# Altium PCB PD_SMARTKEY_EMN-EVAN_V2.0.PcbDoc (part 2 of 2)
Units mil, origin at the board's own origin, x right, y up, seen from the top; angles counter-clockwise.
Board outline 1720.47 x 2326.77 mil, 2 copper layers (Top Layer, Bottom Layer); 109 components, 70 nets, 316 pads, 405 vias.
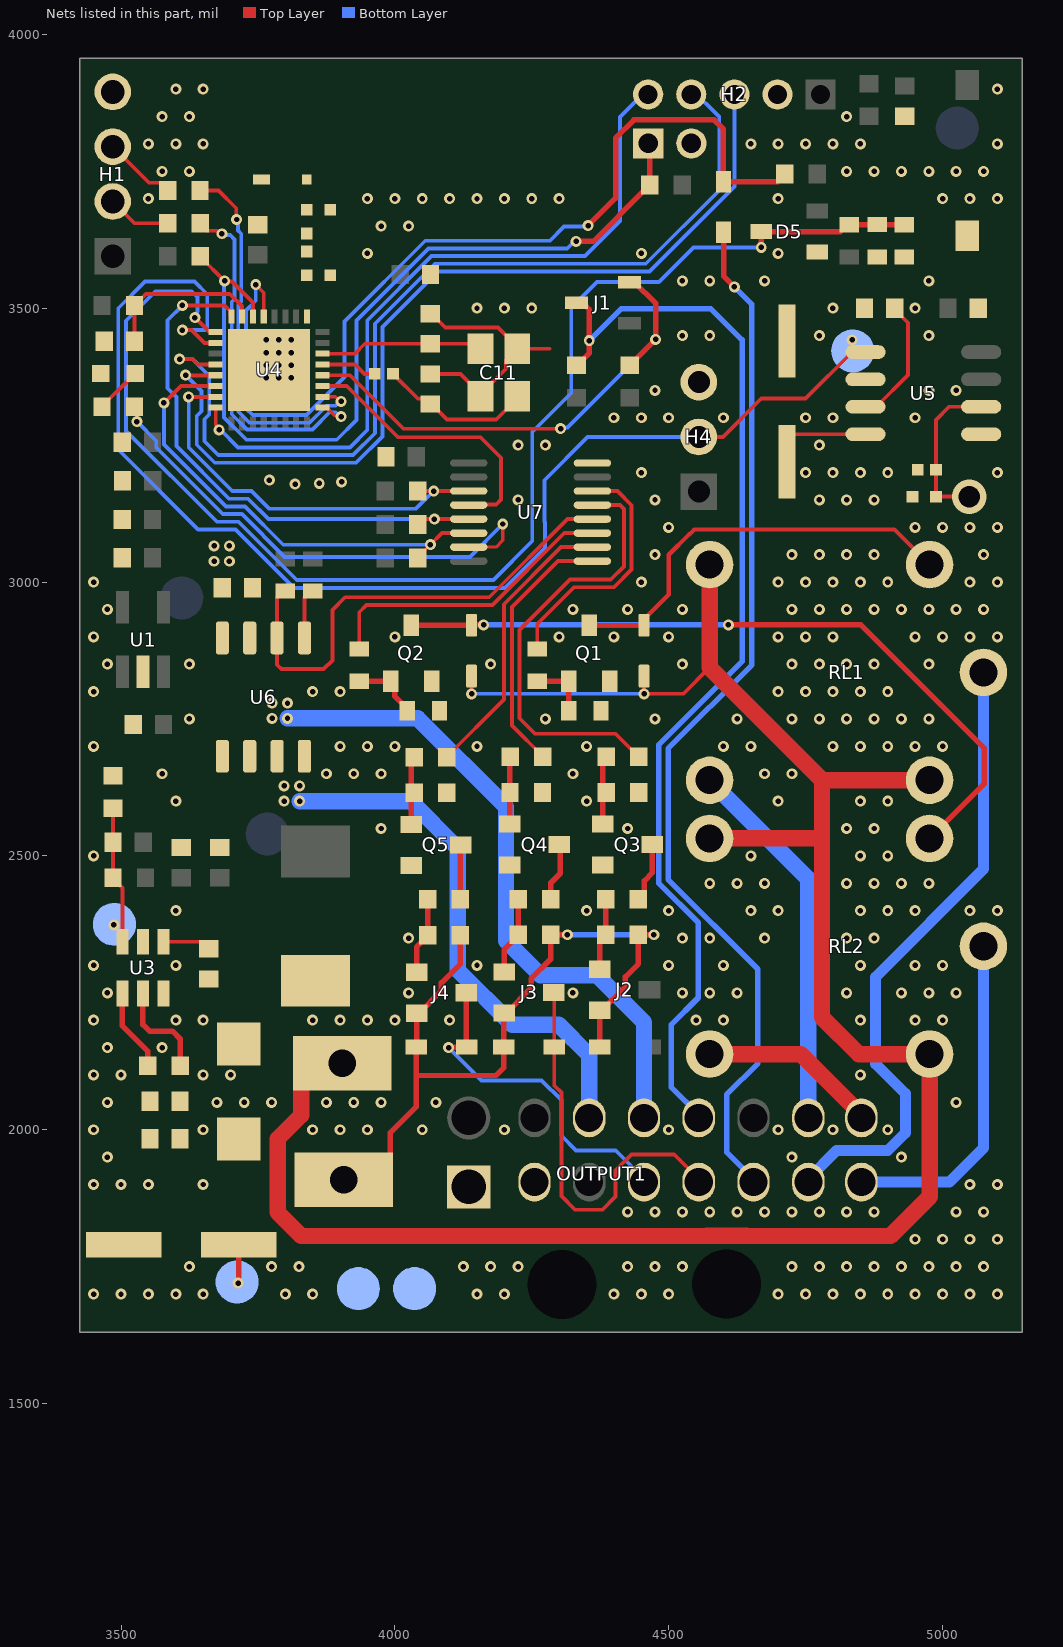
[diagram p2: the nets of this part, all layers, seen from the top]

## Via types
v1: diameter 20, hole 10, Top Layer to Bottom Layer, tented both sides, 404 vias
v2: diameter 62.99, hole 39.37, Top Layer to Bottom Layer, tented both sides, 1 vias

## Nets (pads, with @x,y where several pads share a name; then routed paths per layer and width w, separated by ;. In a path a pad name is that pad's centre, name@x,y a point inside that pad or via, vN(x,y) a via of type N, cw(c..) or ccw(c..) an arc to the next point about the centre after c; other vN are vias at no path point) (continued)
CAR_IGN: D9.2 J4.3 OUTPUT1.4 | length 633.2
  Top Layer w10: v1(4098,2150) 4098.75,2150.75 D9.2@4131.16,2150.75 4130.27,2151.64 J4.3@4130.27,2250
  Bottom Layer w7: v1(4098,2150) 4158,2090 4268,2090 4304,2054 4304,1989 4331,1962 4403.28,1962 4454.9,1910.38 OUTPUT1.4@4454.9,1904.48
CAR_LOCK: OUTPUT1.10 RL1.2 | length 691.3
  Bottom Layer w30: RL1.2@4574.72,2638.15 4754.9,2457.97 OUTPUT1.10@4754.9,2021.48
CAR_MINIO_BREAK: D7.1 OUTPUT1.6 | length 1934
  Top Layer w10: D7.1@4600,3638.84 4600.5,3638.34 4600.5,3558.5 v1(4620,3539)
  Bottom Layer w10: v1(4620,3539) 4652,3507 4652,2848.96 4499,2695.96 4499,2457.04 4663,2293.04 4663,2121 4606,2064 4606,1959.28 4657,1908.28 4657,1905 4654.9,1905 OUTPUT1.6@4654.9,1904.48
CAR_START: D8.2 J3.3 OUTPUT1.5 | length 733
  Top Layer w7: J3.3@4290.27,2250.75 4291.16,2249.86 D8.2@4291.16,2150.75 4291.16,2080.84 4304,2068 4304,1879 4329,1854 4379,1854 4403,1878 4403,1926 4432,1955 4510.28,1955 4554.9,1910.38 OUTPUT1.5@4554.9,1904.48
CAR_TRUNK_B+: OUTPUT1.14 U6.7 U6.8 | length 966.3
  Bottom Layer w30: v1(3826,2600) 4029,2600 4114.84,2514.16 4114.84,2291.16 4214,2192 4299,2192 4354.9,2136.1 OUTPUT1.14@4354.9,2021.48
  other v1: 3798,2600 3798,2628 3826,2628
CAR_TRUNK_B-: OUTPUT1.13 U6.5 U6.6 | length 1198.9
  Bottom Layer w30: v1(3804,2751) 4042,2751 4203,2590 4203,2345 4266,2282 4369,2282 4454.9,2196.1 OUTPUT1.13@4454.9,2021.48
  other v1: 3776,2751 3776,2779 3804,2779
CAR_UNLOCK: OUTPUT1.9 RL2.2 | length 329
  Top Layer w30: RL2.2@4574.72,2138.15 4741.13,2138.15 4851.9,2027.38 OUTPUT1.9@4851.9,2021.48
CLK: H2.4 U4.12 | length 1733.8
  Top Layer w7: v1(3607,3407) 3630.47,3407 3640.17,3397.3 U4.12@3672.93,3397.3
  Bottom Layer w7: v1(3607,3407) 3630.24,3407 3661,3376.24 3661,3306 3652.3,3297.3 3652.3,3257.1 3677.61,3231.79 3923.59,3231.79 3963.57,3271.77 3963.57,3285.77 3963.57,3471.74 4073.01,3581.18 4458.23,3581.18 4592.47,3715.42 4592.47,3849.3 H2.4@4541.26,3900.5
CS2: H2.5 U4.16 | length 1339.6
  Top Layer w7: U4.16@3672.93,3318.56 3672.93,3316.62 3673,3316.55 3673,3287.52 3679,3281.52 v1(3679,3278)
  Bottom Layer w7: v1(3679,3278) 3681.6,3278 3713.81,3245.79 3917.79,3245.79 3949.57,3277.57 3949.57,3477.54 4067.21,3595.18 4347.18,3595.18 4410.98,3658.98 4410.98,3848.96 H2.5@4462.52,3900.5
D_N: R4.1 U4.25 | length 665.4
  Top Layer w7: R4.1@3644.66,3655 3644.66,3653.87 3657.04,3641.49 3674.99,3641.49 3680.48,3636 v1(3684,3636) ; U4.25@3868.01,3318.56 3875.3,3318.56 3889.37,3304.49 3899.51,3304.49 v1(3902,3302)
  Bottom Layer w7: v1(3684,3636) 3686.49,3633.51 3699.55,3633.51 3707.5,3625.56 3707.5,3517.07 3702.19,3511.76 3702.19,3306.34 3729.73,3278.81 3849.38,3278.81 3880.57,3310 3891.4,3310 3899.4,3302 v1(3902,3302)
D_P: R5.1 U4.26 | length 706.7
  Top Layer w7: R5.1@3644.32,3715 3678,3715 3710.5,3682.5 3710.5,3662.5 v1(3711,3662) ; U4.26@3868.01,3338.25 3891.31,3338.25 3899.55,3330 v1(3902,3330)
  Bottom Layer w7: v1(3711,3662) 3713.49,3659.51 3713.49,3641.99 3719.5,3635.98 3719.5,3512.1 3714.19,3506.79 3714.19,3311.31 3734.7,3290.81 3844.4,3290.81 3875.6,3322 3891.4,3322 3899.4,3330 v1(3902,3330)
DATA_SYN480R: H4.2 TP8.1 U4.10 U5.5 | length 2376.8
  Top Layer w7: v1(3612,3460) 3629,3460 3652.33,3436.67 U4.10@3672.93,3436.67 ; H4.2@4555,3265 4599,3265 4669,3335 4750.08,3335 4835.08,3420 U5.5@4843.22,3420 ; v1(4835,3442) 4835,3428.22 U5.5@4843.22,3420 ; U5.5@4859.39,3420 U5.5@4843.22,3420
  Bottom Layer w7: v1(3612,3460) 3612.5,3460.5 3653.39,3460.5 3657.5,3464.6 3657.5,3525.5 3634,3549 3544,3549 3495,3500 3495,3241.8 3640.9,3095.9 3641,3096 3709,3096 3816,2989 4201,2989 4274,3062 4274,3109 4273,3110 4273,3186 4352,3265 H4.2@4555,3265
EN: C18.1 R6.2 U4.7 | length 298.7
  Top Layer w7: C18.1@3524.66,3440 3524.66,3506.13 3537.04,3518.51 3538.17,3518.51 3545.66,3526 3698.59,3526 3720.85,3503.75 3720.85,3485.41 U4.7@3721.26,3485
GND: C2.2 C3.2 C4.2 C6.2 C7.2 C8.2 C9.2 C10.2 C11.2 C11.4 C12.2 C13.2 C14.2 C15.2 C16.2 C17.2 C18.2 C19.2 C20.2 C21.1 C22.2 C23.1 C24.1 C25.2 C26.2 C27.2 C28.2 D4.1 D5.1 H1.4 H2.2 H3.2 H4.3 L3.1 OUTPUT1.2 Q1.2 Q2.2 Q3.2 Q4.2 Q5.2 R3.1 R13.1 R17.1 R22.1 R23.2 R29.2 R35.2 RF1.2 S1.2 TP5.1 TP6.1 U1.2 U3.2 U4.33 U5.1 U5.6 U6.3 U7.8 | length 468
  Top Layer w7: C19.2@4065,3380.12 4119.6,3380.12 C11.4@4156.53,3343.19 ; C20.2@4065,3490.12 4066.97,3490.12 4092.09,3465 4188.27,3465 4223.47,3429.8 C11.2@4223.47,3425.87 ; C11.4@4156.53,3339.25 C11.4@4156.53,3343.19 ; 4282.87,3425.87 C11.2@4223.47,3425.87 ; C11.4@4156.53,3343.19 4202.84,3389.5 4202.84,3405.24 C11.2@4223.47,3425.87
  other v1: 3450,1700 3500,1700 3550,1700 3600,1700 3650,1700 3800,1700 3850,1700 4150,1700 4200,1700 4400,1700 4450,1700 4500,1700 4700,1700 4750,1700 4800,1700 4850,1700 4900,1700 4950,1700 5000,1700 5050,1700 5100,1700 3625,1750 3775,1750 3825,1750 4125,1750 4175,1750 4225,1750 4425,1750 4475,1750 4525,1750 4725,1750 4775,1750 4825,1750 4875,1750 4925,1750 4975,1750 5025,1750 5075,1750 4950,1800 5000,1800 5050,1800 5100,1800 4425,1850 4475,1850 4525,1850 4575,1850 4625,1850 4675,1850 4725,1850 4775,1850 4825,1850 4875,1850 5025,1850 5075,1850 3450,1900 3500,1900 3550,1900 3650,1900 5050,1900 5100,1900 3475,1950 4725,1950 4925,1950 3450,2000 3650,2000 3850,2000 3900,2000 3950,2000 4050,2000 4200,2000 4500,2000 4700,2000 4800,2000 4900,2000 3475,2050 3675,2050 3725,2050 3775,2050 3875,2050 3925,2050 3975,2050 4075,2050 5025,2050 3450,2100 3500,2100 3650,2100 3700,2100 4850,2100 3475,2150 3575,2150 3450,2200 3600,2200 3650,2200 3850,2200 3900,2200 3950,2200 4000,2200 4100,2200 4550,2200 4600,2200 4850,2200 4950,2200 5000,2200 3475,2250 4025,2250 4325,2250 4525,2250 4575,2250 4625,2250 4825,2250 4925,2250 4975,2250 5025,2250 3450,2300 3600,2300 4150,2300 4500,2300 4600,2300 4850,2300 4950,2300 5000,2300 4025,2350 4525,2350 4575,2350 4675,2350 4825,2350 4875,2350 3600,2400 4350,2400 4500,2400 4650,2400 4700,2400 4850,2400 4900,2400 4950,2400 5050,2400 5100,2400 4575,2450 4625,2450 4675,2450 4825,2450 4875,2450 4925,2450 4975,2450 3450,2500 4650,2500 4850,2500 4900,2500 3975,2550 4425,2550 4825,2550 4875,2550 3600,2600 4350,2600 4700,2600 4850,2600 4900,2600 3575,2650 3875,2650 3925,2650 3975,2650 4325,2650 4675,2650 4725,2650 3450,2700 3900,2700 3950,2700 4000,2700 4150,2700 4350,2700 4600,2700 4650,2700 4800,2700 4850,2700 4900,2700 4950,2700 5000,2700 3625,2750 4275,2750 4475,2750 4625,2750 4725,2750 4775,2750 4825,2750 4875,2750 4925,2750 4975,2750 3450,2800 3850,2800 3900,2800 4700,2800 4750,2800 4800,2800 4850,2800 4900,2800 3475,2850 3625,2850 4175,2850 4525,2850 4725,2850 4775,2850 4825,2850 4875,2850 4975,2850 3450,2900 4000,2900 4300,2900 4400,2900 4500,2900 4700,2900 4750,2900 4800,2900 4950,2900 5000,2900 5050,2900 5100,2900 3475,2950 4325,2950 4425,2950 4525,2950 4725,2950 4775,2950 4825,2950 4875,2950 4925,2950 4975,2950 5025,2950 5075,2950 3450,3000 4450,3000 4700,3000 4750,3000 4800,3000 4850,3000 4900,3000 5050,3000 5100,3000 4475,3050 4725,3050 4775,3050 4825,3050 4875,3050 5075,3050 4500,3100 4950,3100 5000,3100 5050,3100 5100,3100 4225,3150 4475,3150 4775,3150 4825,3150 4875,3150 3818,3179 3862,3180 3903,3183 3771,3186 4450,3200 4750,3200 4800,3200 4850,3200 4900,3200 5100,3200 4225,3250 4275,3250 4775,3250 4400,3300 4450,3300 4500,3300 4600,3300 4750,3300 4800,3300 4950,3300 4475,3350 4975,3350 5025,3350 3765,3373 3788,3373 3811,3373 3765,3396 3788,3396 3811,3396 3765,3419 3788,3419 3811,3419 3765,3442 3788,3442 3811,3442 4525,3450 4575,3450 4775,3450 4975,3450 4150,3500 4200,3500 4250,3500 4800,3500 4950,3500 4525,3550 4575,3550 4675,3550 4975,3550 3950,3600 4450,3600 4700,3600 3975,3650 4025,3650 3550,3700 3950,3700 4000,3700 4050,3700 4100,3700 4150,3700 4200,3700 4250,3700 4300,3700 4700,3700 5000,3700 5050,3700 5100,3700 3575,3750 3625,3750 4825,3750 4875,3750 4925,3750 4975,3750 5025,3750 5075,3750 3550,3800 3600,3800 3650,3800 4650,3800 4700,3800 4750,3800 4800,3800 4850,3800 5100,3800 3575,3850 3625,3850 4825,3850 3600,3900 3650,3900 5100,3900
HC595-CLK: R9.1 U4.15 U7.11 | length 742.3
  Top Layer w7: v1(3623.61,3338.13) 3623.67,3338.19 U4.15@3672.93,3338.25 U4.15@3672.93,3338.25 ; R9.1@4041.51,3166.18 v1(4071,3166.18) U7.11@4135,3166.18
  Bottom Layer w7: v1(3623.61,3338.13) 3623.61,3245.59 3703.2,3166 3737.99,3166 3769.99,3134 4038.82,3134 v1(4071,3166.18)
HC595-DATA: R8.1 U4.14 U7.14 | length 858.1
  Top Layer w7: v1(3578.37,3326.97) 3609.33,3357.93 U4.14@3672.93,3357.93 ; R8.1@4041.66,3044 4041.66,3045.13 v1(4064.76,3068.24) 4085.94,3089.41 U7.14@4135,3089.41
  Bottom Layer w7: v1(3578.37,3326.97) 3578.37,3251.24 3691.6,3138 3726.4,3138 3796.16,3068.24 v1(4064.76,3068.24)
HC595-ENABLE: R7.1 U4.8 U7.13 | length 1000.5
  Top Layer w7: v1(3612,3505) 3689.24,3505 3699.56,3494.68 3699.56,3487.01 U4.8@3701.57,3485 ; R7.1@4041.66,3105 4051.66,3115 v1(4072,3115) U7.13@4135,3115
  Bottom Layer w7: v1(3612,3505) 3585,3478 3585,3354 3601.12,3337.88 3601.12,3248.28 3697.4,3152 3732.2,3152 3769.2,3115 v1(4072,3115)
HC595-LATCH: U4.27 U7.12 | length 519.7
  Top Layer w7: U4.27@3868.01,3357.93 3912.07,3357.93 4005.61,3264.39 4156.61,3264.39 4194,3227 4194,3150.75 4185.09,3141.83 4136.24,3141.83 U7.12@4135,3140.59
HV-MD125KHZ: J1.3 OUTPUT1.12 R14.2 | length 2024
  Top Layer w10: J1.3@4331.38,3510 4338.19,3503.19 4349.14,3503.19 4355,3497.33 v1@4355,3438.29 ; R14.2@4331.75,3396.08 4332.88,3396.08 4355,3418.2 v1(4355,3441)
  Bottom Layer w10: v1(4355,3441) 4413,3499 4577,3499 4634,3442 4634,2855 4482,2703 4482,2450 4554,2378 4554,2241 4505,2192 4505,2077.28 4554.9,2027.38 OUTPUT1.12@4554.9,2021.48
LED_STATUS: R19.1 U7.15 | length 928.2
  Top Layer w6: R19.1@3524.66,3320 3529,3315.66 v1(3529,3293) ; U7.15@4135,3063.82 4184.82,3063.82 4197,3076 v1(4197,3106)
  Bottom Layer w7: v1(3529,3293) 3564.37,3257.63 3564.37,3245.44 3685.8,3124 3720.6,3124 3798.6,3046 4137,3046 v1(4197,3106)
LV-MD125KHZ: J1.2 R15.2 U4.28 | length 913.2
  Top Layer w7: U4.28@3868.01,3377.62 3918.38,3377.62 4016,3280 4301,3280 4302,3281 4302.68,3280.32 v1(4302.68,3280.08)
  Top Layer w10: J1.2@4428.62,3547.4 4437.87,3547.4 4476,3509.28 v1@4476,3443.06 ; R15.2@4429.02,3396.08 4430.15,3396.08 4441.02,3406.95 4441.02,3408.09 v1@4475.94,3443
  Bottom Layer w7: v1(4302.68,3280.08) 4304.98,3282.38 4315.38,3282.38 v1(4476,3443)
MCU_ACC: R24.1 U7.5 | length 812.6
  Top Layer w7: U7.5@4360.65,3140.59 4411.41,3140.59 4418.34,3133.66 4418.34,3028.64 4394.3,3004.6 4319.99,3004.6 4227.66,2912.27 4227.66,2751.34 4256,2723 4402.75,2723 4430.99,2694.76 4432.12,2694.76 4445,2681.88 R24.1@4445,2680.75
MCU_ECVAN_BREAK: C24.2 D5.3 R20.1 R22.2 U4.9 | length 2473.9
  Top Layer w7: v1(3635,3483) 3659.63,3458.37 3670.92,3458.37 U4.9@3672.93,3456.36
  Top Layer w10: v1(4669,3611) 4668.82,3611.18 D5.3@4668.82,3640 4813.66,3640 4826.06,3652.4 R20.1@4830,3652.4 R22.2@4930,3652.4
  Bottom Layer w7: v1(3635,3483) 3637.49,3485.49 3637.49,3491.7 3639.39,3493.6 3639.39,3520.61 3629,3531 3563,3531 3509,3477 3509,3276 3675,3110 3714.8,3110 3820.8,3004 4180,3004 4251,3075 4251,3274 4322,3345 4322,3501 4369,3548 4482,3548 4545,3611 v1(4669,3611)
MCU_EVAN-EMN: H3.1 R10.1 R25.2 U4.6 | length 1574.9
  Top Layer w7: R10.1@3644.66,3595 3644.66,3593.87 v1@3688.76,3549.76 ; v1@3689.53,3549 3689.68,3548.85 3702.84,3548.85 3740.94,3510.74 U4.6@3740.94,3485
  Top Layer w10: v1(4331,3622) 4362.34,3622 4453.33,3712.99 4454.46,3712.99 4465.34,3723.87 R25.2@4465.34,3725 ; R25.2@4465.63,3730.29 H3.1@4465.63,3805
  Bottom Layer w7: v1(3689,3550) 3688.19,3549.19 3688.19,3300.54 3728.94,3259.79 3893.88,3259.79 3930,3295.91 3930,3477.77 4061.41,3609.18 4314.83,3609.18 4327.65,3622 v1(4331,3622)
MCU_IGN: R36.1 U7.2 | length 527.5
  Top Layer w7: R36.1@4094.66,2680 4094.66,2681.13 4199,2785.47 4199,2959.4 4303.42,3063.82 U7.2@4360.65,3063.82
MCU_LOCK: R11.2 U7.6 | length 458.8
  Top Layer w7: R11.2@4260,2877.87 4260,2923.36 4327.23,2990.6 4400.1,2990.6 4432.34,3022.84 4432.34,3140.19 4406.34,3166.18 U7.6@4360.65,3166.18
MCU_MINIO_BREAK: D7.2 R26.2 U4.5 | length 1742.3
  Top Layer w7: v1(3746,3543) 3760.63,3528.37 U4.5@3760.63,3485
  Top Layer w10: v1(4353,3651) 4403,3701 4403,3810.63 4436.37,3844 4583,3844 4600,3827 D7.2@4600,3731.16 4699.16,3731.16 4711.86,3743.87 R26.2@4711.86,3745
  Bottom Layer w7: v1(3746,3543) 3746,3513.75 3728.19,3495.94 3728.19,3348.3 3728.19,3317.11 3740.5,3304.81 3838.61,3304.81 3869.8,3336 3908,3374.2 3908,3475.57 4055.61,3623.18 4283.18,3623.18 4309,3649 4351,3649 v1(4353,3651)
MCU_START: R30.1 U7.1 | length 478.6
  Top Layer w7: R30.1@4270,2680.75 4270,2681.88 4213.66,2738.22 4213.66,2954.26 4297.62,3038.23 U7.1@4360.65,3038.23
MCU_TRUNK: R32.2 U6.2 U7.4 | length 889.2
  Top Layer w7: R32.2@3800,2983.35 3796.07,2983.35 3785,2972.28 U6.2@3785,2898 3785,2849 3793,2841 3870,2841 3886,2857 3886,2949 3909.3,2972.3 4172.3,2972.3 4315,3115 U7.4@4360.65,3115
MCU_UNLOCK: R16.2 U7.3 | length 552.6
  Top Layer w7: R16.2@3935,2877.87 3935,2945 3948.3,2958.3 4178.1,2958.3 4309.21,3089.41 U7.3@4360.65,3089.41
MOSI: H2.3 U4.13 | length 1697.6
  Top Layer w7: v1(3618,3378) 3618.74,3377.26 U4.13@3672.57,3377.26
  Bottom Layer w7: v1(3618,3378) 3647,3349 3647,3311.96 3638.3,3303.26 3638.3,3250.7 3671.21,3217.79 3929.39,3217.79 3977.57,3265.97 3977.57,3279.97 3977.57,3465.94 4078.81,3567.18 4465.18,3567.18 4620.04,3722.04 H2.3@4620.04,3900.46
MOTOR_LOCK: OUTPUT1.7 RL1.1 | length 1162.5
  Bottom Layer w20: OUTPUT1.7@4754.9,1904.48 4754.9,1910.38 4806.52,1962 4900,1962 4932,1994 4932,2066 4878,2120 4878,2279 5074.72,2475.72 RL1.1@5074.72,2835
MOTOR_UNLOCK: OUTPUT1.8 RL2.1 | length 616.9
  Bottom Layer w20: OUTPUT1.8@4851.9,1904.48 5012.48,1904.48 5074.72,1966.72 RL2.1@5074.72,2335
NetC1_1: C1.1 U2.1 U3.6
NetC1_2: C1.2 U3.1 | length 87.9
  Top Layer w7: U3.1@3577.4,2343.35 3645.25,2343.35 3658.03,2330.56 C1.2@3660,2330.56
NetC5_2: C5.2 R1.1 R3.2 TP4.1 U3.3 | length 252.2
  Top Layer w7: R3.2@3485.34,2587 C5.2@3485.34,2525 R1.1@3485.34,2460 3485.34,2458.87 3502.6,2441.61 U3.3@3502.6,2343.34
  Bottom Layer w7: v1(3487,2374) TP4.1@3488,2375
NetC8_1: C8.1 C9.1 C10.1 D1.1 R2.1 TP3.1 U3.5 | length 255.2
  Top Layer w10: U3.5@3540,2248.86 3540,2192 3552,2180 3594,2180 3607.88,2166.12 R2.1@3607.88,2116.75 ; v1(3714,1720) 3715,1721 C10.1@3715,1790
NetC16_1: C16.1 L1.2 U4.1
NetC17_1: C17.1 L1.1 RF1.1
NetC22_1: C22.1 U5.8 | length 186.5
  Top Layer w7: C22.1@4715.98,3219.76 4715.98,3257.75 4728.23,3270 U5.8@4859.39,3270
NetC23_2: C23.2 U5.7 | length 233.7
  Top Layer w7: U5.7@4859.39,3320 4878.88,3320 4937,3378.12 4937,3473.59 4912.56,3498.03 C23.2@4912.56,3500
NetC26_1: C26.1 L3.2 U5.2 | length 293.6
  Top Layer w7: v2(5049,3156) C26.1@4988,3156 L3.2@4988,3205 4988,3296 5012,3320 U5.2@5070.61,3320
NetD2_1: D2.1 Q1.3 RL1.4 | length 769.4
  Top Layer w8: Q1.3@4355,2921.18 D2.1@4455,2921.18 4455,2932.2 4500,2977.2 4500,3050 4537,3087 4538,3087 4547,3096 4912.15,3096 RL1.4@4976.3,3031.85
NetD3_1: D3.1 Q2.3 RL2.4 | length 1346
  Top Layer w10: Q2.3@4030,2921.18 D3.1@4140,2921.18 4140.82,2922 v1(4162,2922) ; v1(4609,2922) 4851,2922 5076,2697 5076,2631.55 RL2.4@4976.3,2531.85
  Bottom Layer w10: v1(4162,2922) v1(4609,2922)
NetD4_2: D4.2 R19.2 | length 86.6
  Top Layer w7: R19.2@3465.34,3320 3465.34,3321.13 3512.46,3368.25 3513.25,3368.25 D4.2@3526,3381
NetH1_2: H1.2 R4.2 | length 116.9
  Top Layer w7: H1.2@3485,3695 3525,3655 R4.2@3585.34,3655
NetH1_3: H1.3 R5.2 | length 133.8
  Top Layer w7: H1.3@3485,3795 3550.99,3729.01 3572.12,3729.01 3585,3716.13 R5.2@3585,3715
NetJ2_1: J2.1 R18.2 R21.1 | length 132.1
  Top Layer w10: J2.1@4374.45,2293.15 4374.45,2343.73 4385.34,2354.62 R18.2@4385.34,2355.75 R21.1@4385.34,2420.75
NetJ3_1: J3.1 R27.2 R28.1 | length 143.2
  Top Layer w10: J3.1@4199.73,2288.15 4199.73,2329 4225.34,2354.62 R27.2@4225.34,2355.75 R28.1@4225.34,2420.75
NetJ4_1: J4.1 R31.2 R34.1 | length 141.9
  Top Layer w10: J4.1@4039.72,2287.4 4039.72,2333.25 4060.34,2353.87 R31.2@4060.34,2355 R34.1@4060.34,2420.75
NetL2_1: L2.1 U4.29 | length 102.6
  Top Layer w7: U4.29@3868.01,3397.3 3927.7,3397.3 3944.88,3380.12 L2.1@3963.47,3380.12
NetQ1_1: Q1.1 R11.1 R13.2 | length 111.4
  Top Layer w10: R11.1@4260,2818.82 Q1.1@4317.6,2818.82 R13.2@4317.6,2765
NetQ2_1: Q2.1 R16.1 R17.2 | length 123.8
  Top Layer w10: R16.1@3935,2818.82 Q2.1@3992.6,2818.82 3999.68,2811.74 3999.68,2791.85 4022.6,2768.93 R17.2@4022.6,2765
NetQ3_1: Q3.1 R23.1 R24.2 | length 125.1
  Top Layer w10: Q3.1@4379.72,2558.15 4379.72,2674.79 R24.2@4385.68,2680.75
NetQ3_3: Q3.3 R21.2 | length 110.6
  Top Layer w10: R21.2@4444.66,2420.75 4455.54,2431.62 4455.54,2454.54 4470.27,2469.27 Q3.3@4470.27,2520.75
NetQ4_1: Q4.1 R29.1 R30.2 | length 123
  Top Layer w10: Q4.1@4209.72,2558.15 4209.72,2679.79 R30.2@4210.68,2680.75
NetQ4_3: Q4.3 R28.2 | length 107.9
  Top Layer w10: R28.2@4284.66,2420.75 4284.66,2450.66 4302,2468 4302,2519.02 Q4.3@4300.27,2520.75
NetQ5_1: Q5.1 R35.1 R36.2 | length 124.9
  Top Layer w10: Q5.1@4029.72,2557.4 4029.72,2674.38 R36.2@4035.34,2680
NetQ5_3: Q5.3 R34.2 | length 99.5
  Top Layer w10: R34.2@4119.66,2420.75 4119.66,2519.38 Q5.3@4120.27,2520
NetR2_2: R2.2 U3.4 | length 151.1
  Top Layer w10: U3.4@3502.6,2248.86 3502.6,2189.4 3548.55,2143.45 R2.2@3548.55,2116.75
NetR33_2: R33.2 U6.1 | length 93.9
  Top Layer w7: U6.1@3835,2898 3835,2972.28 3846.07,2983.35 R33.2@3850,2983.35
VCC: D6.1 D8.1 D9.1 J2.2 J3.2 J4.2 OUTPUT1.1 OUTPUT1.18 R18.1 R27.1 R31.1 | length 1460
  Top Layer w10: OUTPUT1.18@3906.9,1908.48 3946.9,1908.48 3991.9,1953.48 3991.9,1994.9 4038.84,2041.84 4038.84,2099.04 ; R31.1@4119.66,2355 4119.66,2302.66 4085,2268 4085,2253.93 4043.66,2212.6 J4.2@4039.72,2212.6 4039.72,2151.64 D9.1@4038.84,2150.75 4038.84,2099.04 ; D8.1@4198.84,2150.75 4198.84,2212.45 J3.2@4199.73,2213.34 4203.66,2213.34 4249,2258.68 4249,2276 4284.66,2311.66 R27.1@4284.66,2355.75 4314.75,2355.75 v1(4315,2356) ; D8.1@4199,2150.58 4199,2113.53 4184.5,2099.04 4038.84,2099.04 ; D6.1@4373.84,2150.75 4373.84,2217.73 J2.2@4374.45,2218.35 4378.39,2218.35 4421,2260.96 4421,2279 4444.66,2302.66 R18.1@4444.66,2355.75 4444.91,2356 v1(4473,2356)
  Bottom Layer w10: v1(4315,2356) v1(4473,2356)
VCC-B: C28.1 D1.2 D2.2 D3.2 OUTPUT1.17 RL1.3 RL1.5 RL2.3 RL2.5 U6.4 | length 3900.2
  Top Layer w7: v1(4140,2796) D3.2@4140,2828.27 ; D2.2@4455,2828.27 v1(4455,2796) 4526.85,2796 4574.72,2843.87
  Top Layer w30: OUTPUT1.17@3903.9,2121.48 3863.9,2121.48 3828.9,2086.48 3828.9,2026.48 3786,1983.58 3786,1849 3829,1806 4569.21,1806 4569.52,1806.31 4642.28,1806.31 4642.59,1806 4905,1806 4976.3,1877.3 RL2.5@4976.3,2138.15 4846.85,2138.15 4780,2205 4780,2531.92 ; RL2.3@4574.72,2531.85 4779.93,2531.85 4780,2531.92 ; RL1.3@4574.72,3031.85 4574.72,2843.87 4780,2638.6 ; RL1.5@4976.3,2638.15 4780.45,2638.15 4780,2638.6 ; 4780,2531.92 4780,2638.6
  Bottom Layer w7: v1(4140,2796) v1(4455,2796)
  other v1: 3670,3038 3698,3038 3670,3066 3698,3066
XIN: C11.1 C19.1 L2.2 | length 285.1
  Top Layer w7: L2.2@3996.53,3380.12 4041.8,3334.86 4055.14,3334.86 C19.1@4065,3325 4066.97,3325 4094.97,3297 4185.15,3297 4223.47,3335.32 C11.1@4223.47,3339.25 C11.1@4223.47,3343.19
XOUT: C11.3 C20.1 U4.30 | length 299.8
  Top Layer w7: U4.30@3868.01,3416.99 3926.99,3416.99 3945,3435 C20.1@4065,3435 4147.4,3435 C11.3@4156.53,3425.87
pads on no net: OUTPUT1. OUTPUT1.15 OUTPUT1.16 U1.4 U4.18 U4.19 U4.20 U4.21 U4.22 U4.23 U4.24 U5.4 U7.7 U7.9

## Polygon pours and split planes (outlines as drawn)
GND on Top Layer "NONET_L-01_P-001" (solid, pour order 0): 3425,1630 5145.47,1630 5145.47,3956.77 3425,3956.77
GND on Bottom Layer "NONET_L-01_P-001" (solid, pour order 1): 3425,1630 5145.47,1630 5145.47,3956.77 3425,3956.77

## Keep-outs
Keep-Out Layer:
  the board outline again, w11.81

## Other copper
Top Layer:
  region net +3.3: 3587,3038 3587,3066 cw(c3601,3066) 3601,3080 3629,3080 cw(c3629,3066) 3643,3066 3643,3038 cw(c3629,3038) 3629,3024 3601,3024 cw(c3601,3038)
  region net CAR_TRUNK_B+: 3784,2600 3784,2628 cw(c3798,2628) 3798,2642 3826,2642 cw(c3826,2628) 3840,2628 3840,2600 cw(c3826,2600) 3826,2586 3798,2586 cw(c3798,2600)
  region net CAR_TRUNK_B-: 3762,2751 3762,2779 cw(c3776,2779) 3776,2793 3804,2793 cw(c3804,2779) 3818,2779 3818,2751 cw(c3804,2751) 3804,2737 3776,2737 cw(c3776,2751)
  region net VCC-B: 3656,3038 3656,3066 cw(c3670,3066) 3670,3080 3698,3080 cw(c3698,3066) 3712,3066 3712,3038 cw(c3698,3038) 3698,3024 3670,3024 cw(c3670,3038)
  region net GND: 3740.82,3743.86 3739,3742.04 3739,3726.38 3738.62,3726 3725,3726 3725,3707 3782,3707 3782,3726 3781.88,3726.12 3774.17,3726.12 3774.17,3742.01 3772.32,3743.86
  region net NetC17_1: 3828.74,3625.9 3828.74,3725.57 3830.51,3727.34 3830.51,3743.86 3848.23,3743.86 3848.23,3726.14 3848.95,3726.14 3850,3725.09 3850,3625.9
  region net NetC16_1: 3844.88,3472.2 3844.88,3497.8 3850,3502.91 3850,3614.1 3828.74,3614.1 3828.74,3549.37 3828.74,3502.91 3833.86,3497.8 3833.86,3472.2
  pour cut-out: 4028,3522 4107,3522 4107,3476 4268,3476 4268,3291 4028,3291 4028,3445
  pour cut-out: 3739,3727 3774,3727 3774.86,3726.14 4363,3726.14 4363,3957 3679,3957 3679,3726.12 3738.73,3726.12
  region net +3.3: 3855.22,3461.87 3855.22,3431.16 3880.81,3431.16 3880.81,3461.87
  region net +3.3: 3794.49,3497.79 3825.19,3497.79 3825.19,3472.21 3825.2,3472.2 3794.49,3472.2
  region net +3.3: 3490.95,2924.53 3514.57,2924.53 3514.57,2967.8 3573.31,3026.54 3573.31,3272.72 3541.81,3272.72 3541.81,3026.54 3498.86,2983.58 3490.95,2983.58
  region net +5: 3490.95,2889.95 3512,2911 3570.74,2911 3589.37,2892.37 3589.37,2806.42 3592.52,2803.27 3592.52,2713.52 3556.21,2677.21 3556.21,2481.34 3560.54,2477.01 3561.8,2475.75 3697.72,2475.75 3777.32,2555.35 3917.99,2555.35 3917.99,2460.86 3792.01,2460.86 3775.4,2444.25 3561.8,2444.25 3560.54,2442.99 3528.78,2442.99 3528.78,2503.21 3524.71,2507.28 3524.71,2685.18 3561.81,2722.28 3561.81,2802.48 3565.75,2806.42 3565.75,2882.25 3558,2890 3523,2890 3514.57,2881.57 3514.57,2806.42 3490.95,2806.42
  pour cut-out: 3984.92,2527.8 3725.08,2527.8 3725.08,2252.21 3725.47,2252.6 3984.92,2252.6
  region net NetC1_1: 3566.57,2272.48 3623.58,2272.48 3642.28,2291.19 3755.19,2291.19 3783.14,2319.14 3917.99,2319.14 3917.99,2224.65 3791.35,2224.65 3756.31,2259.69 3677.72,2259.69 3643.26,2225.24 3566.57,2225.24
  region net NetC8_1: 3754.37,2022.75 3754.37,1843.15 3783.9,1813.62 3783.9,1766.38 3646.1,1766.38 3592.13,1820.35 3592.13,2131.78 3594.1,2133.76 3625.85,2133.76 3625.85,1967.89 3623.62,1965.67 3623.62,1836.1 3646.1,1813.62 3675.63,1813.62 3675.63,1944.01 3675.63,2022.75
  region net CAR_TRUNK_B+: 3844.19,2712 3847,2709.19 3847,2635 3840,2628 3840,2594.2 3831.8,2586 3792.2,2586 3784,2594.2 3784,2628 3773,2639 3773,2709.19 3775.81,2712 3777.8,2712
  region net CAR_TRUNK_B-: 3675.81,2652 3673,2654.81 3673,2768 3698,2793 3775.8,2793 3775.8,2737 3757,2737 3747,2727 3747,2654.81 3744.19,2652 3742.2,2652
  region net VCC-B: 3673,2898 3673,2967.79 3669.25,2971.54 3669.25,3018.95 3656,3032.2 3656,3038 3712,3038 3712,3032.2 3700.75,3020.95 3700.75,2971.54 3697,2967.79 3697,2898
  region net VCC-B: 3993.9,2171.48 3798.52,2171.48 3774.01,2195.99 3675.63,2195.99 3675.63,2117.25 3754.37,2117.25 3800.14,2071.48 3993.9,2071.48
  region net VCC: 4174.27,1934.85 4020.53,1934.85 3996.9,1958.48 3816.9,1958.48 3816.9,1858.48 3996.9,1858.48 3999.27,1856.11 4174.27,1856.11
Bottom Layer:
  region net +3.3: 3587,3038 3587,3066 cw(c3601,3066) 3601,3080 3629,3080 cw(c3629,3066) 3643,3066 3643,3038 cw(c3629,3038) 3629,3024 3601,3024 cw(c3601,3038)
  region net CAR_TRUNK_B+: 3784,2600 3784,2628 cw(c3798,2628) 3798,2642 3826,2642 cw(c3826,2628) 3840,2628 3840,2600 cw(c3826,2600) 3826,2586 3798,2586 cw(c3798,2600)
  region net CAR_TRUNK_B-: 3762,2751 3762,2779 cw(c3776,2779) 3776,2793 3804,2793 cw(c3804,2779) 3818,2779 3818,2751 cw(c3804,2751) 3804,2737 3776,2737 cw(c3776,2751)
  region: 3656,3038 3656,3066 cw(c3670,3066) 3670,3080 3698,3080 cw(c3698,3066) 3712,3066 3712,3038 cw(c3698,3038) 3698,3024 3670,3024 cw(c3670,3038)
  region net VCC-B: 3993.9,2171.48 3813.9,2171.48 3712,2273.38 3712,3052 3656,3052 3656,2229.38 3813.9,2071.48 3993.9,2071.48
  pour cut-out: 3739,3727 3774,3727 3774.86,3726.14 4363,3726.14 4363,3957 3679,3957 3679,3726.12 3738.73,3726.12
  pour cut-out: 3984.92,2527.8 3725.08,2527.8 3725.08,2252.21 3725.47,2252.6 3984.92,2252.6

## Silkscreen, mask and mechanical layers (free items; w line width, h text height)
Top Overlay:
  lines w10: 3550,3570 3550,3860
Mechanical 15:
  circle w10: c3635.04,3828.04 r68.9
  circle w10: c5030.39,1966.28 r68.9
  lines w10: 3592.24,3828.04 3677.83,3828.04 ; 3635.04,3785.24 3635.04,3870.83 ; 4954.6,1966.28 5106.18,1966.28 ; 5030.39,1890.5 5030.39,2042.07